# Altium PCB EvoHD_Pro_RevA.PcbDoc
Units mm, origin at the board's own origin, x right, y up, seen from the top; angles counter-clockwise.
Board outline 41 x 131.5 mm, 4 copper layers (Top Layer, Mid Layer 1, Mid Layer 2, Bottom Layer), stack 1.57 mm thick; 11 components, 17 nets, 157 pads, 0 vias.
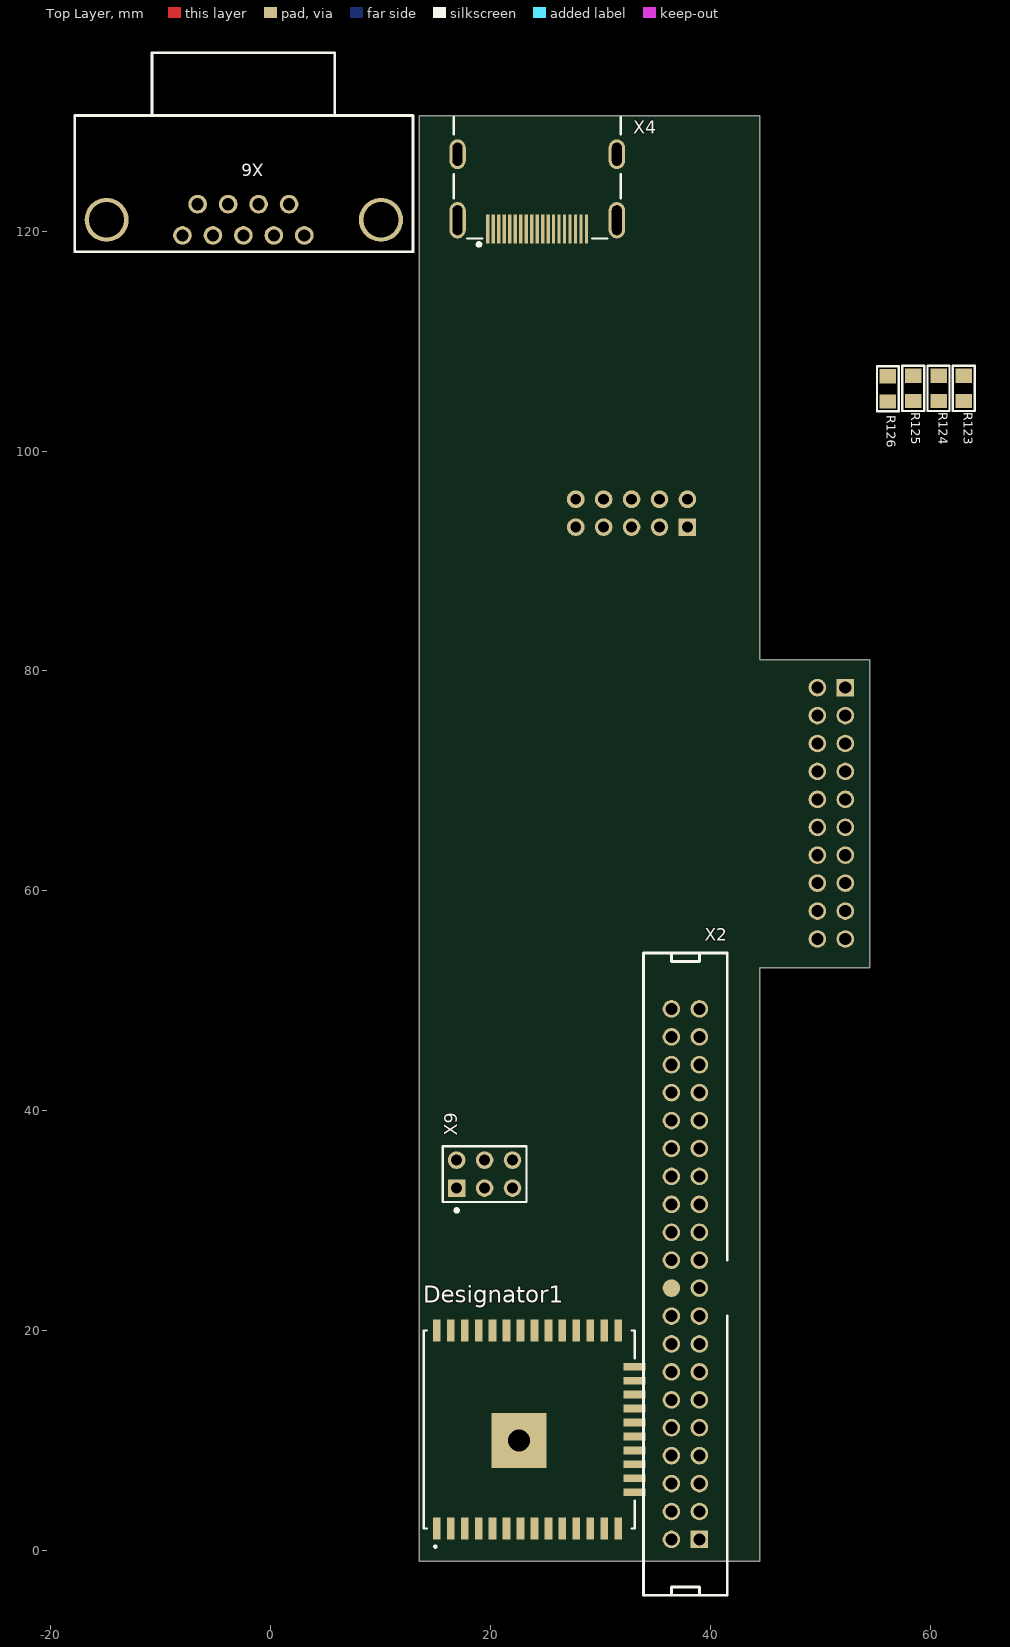
[diagram p0: Top Layer view]
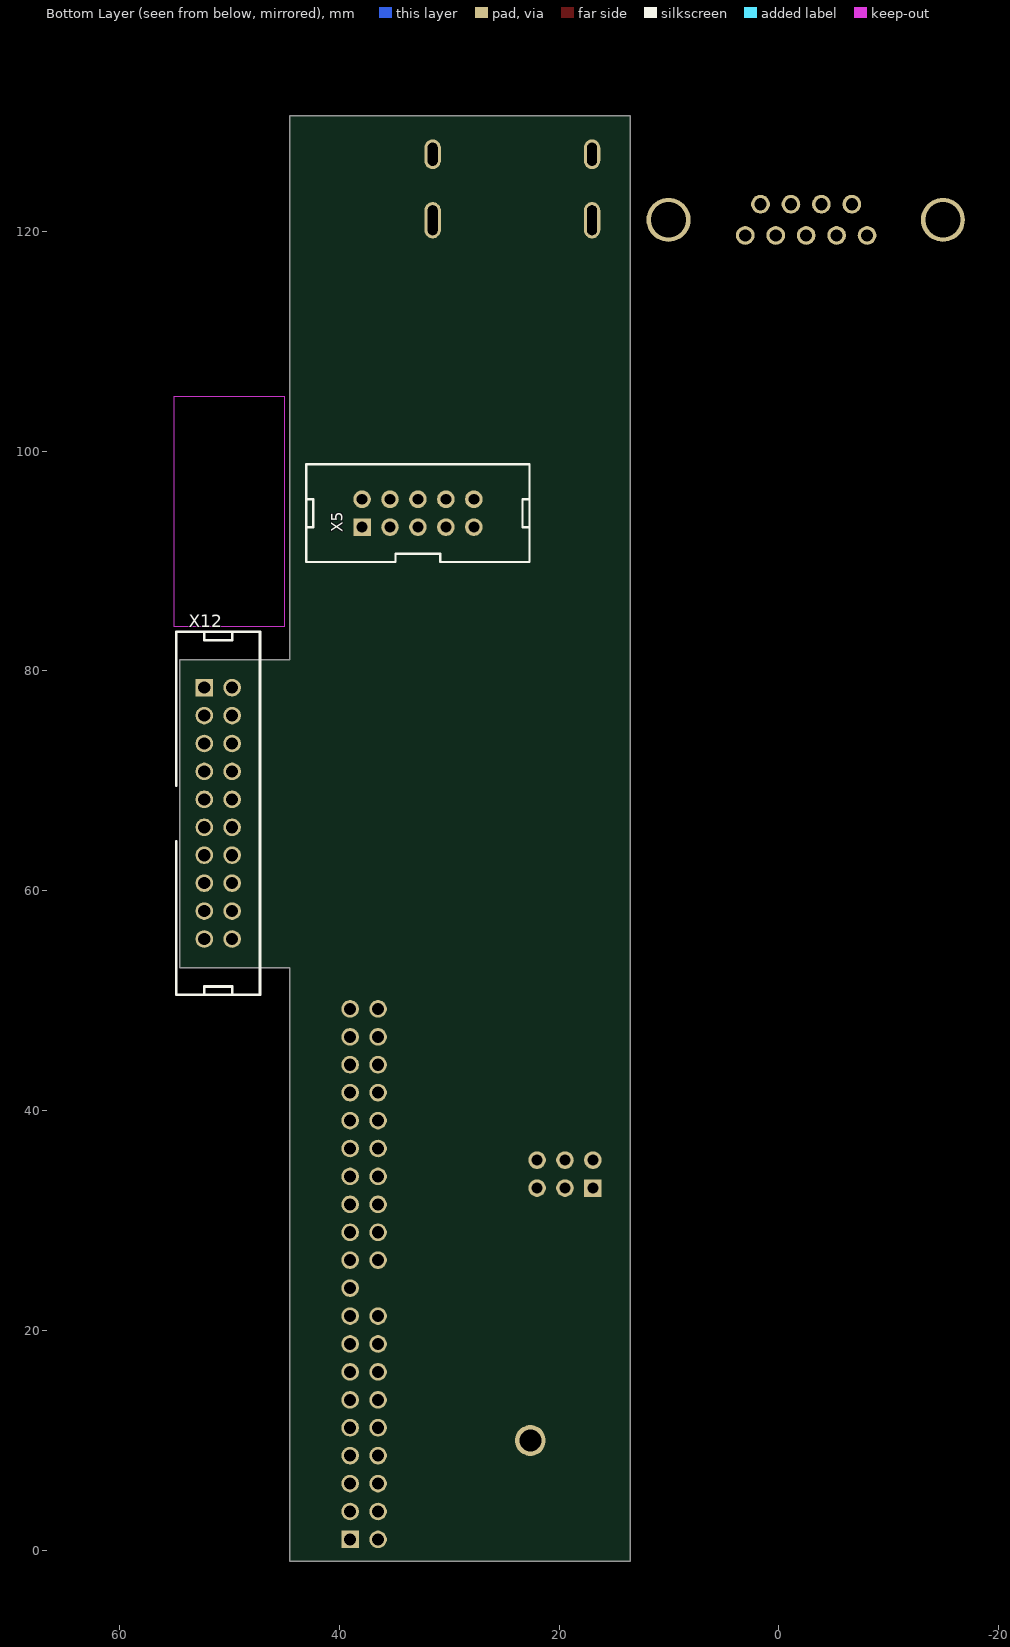
[diagram p1: Bottom Layer view, seen from below]

## Layer stack, top to bottom
Top Solder: solder mask 0.0127, Solder Resist, Dk 3.8
Top Layer: signal copper 0.035
Dielectric 1: prepreg 0.1, 2313, Dk 4.05
Mid Layer 1: signal copper 0.0175
Core: core 1.265, FR-4, Dk 4.5
Mid Layer 2: signal copper 0.0175
Dielectric 2: prepreg 0.1, 2313, Dk 4.05
Bottom Layer: signal copper 0.035
Bottom Solder: solder mask 0.0127, Solder Resist, Dk 3.8

## Board outline
13.5,-1 13.5,130.5 44.5,130.5 44.5,81 54.5,81 54.5,53 44.5,53 44.5,-1

## Design rules (kind name [scope] priority, off if disabled: settings)
BoardOutlineClearance [All] p1: gap=0.2 ignorepadtopadclearanceinfootprint=FALSE
Clearance [All] p1: gap=0.102 ignorepadtopadclearanceinfootprint=FALSE except(0.127: Arc-Via Track-Via SMDPad-Via THPad-Via Via-Via Via-Fill Via-Poly Via-Region Via-Text; 0.25: Arc-Hole Track-Hole SMDPad-Hole THPad-Hole Via-Hole Fill-Hole Poly-Hole Region-Hole Text-Hole)
ComponentClearance [All] p1: gap=0.102 collisioncheckmode=3 verticalgap=0.102 showdistances=TRUE
DiffPairsRouting [All] p1: maxlimit=0.102 minlimit=0.102 mostfreqgap=0.102 toplayer_minwidth=0.102 toplayer_maxwidth=1816.048 toplayer_prefwidth=0.102 midlayer1_minwidth=0.102 midlayer1_maxwidth=1816.048 midlayer1_prefwidth=0.102 midlayer2_minwidth=0.102 midlayer2_maxwidth=1816.048 midlayer2_prefwidth=0.102 bottomlayer_minwidth=0.102 bottomlayer_maxwidth=1816.048 bottomlayer_prefwidth=0.102 maxuncoupledlength=12.7
Height [All] p1: minheight=0 maxheight=1816.048 prefheight=12.7
HoleSize [All] p1: absolutevalues=TRUE maxlimit=6.3 minlimit=0.2 maxpercent=80.000 minpercent=20.000
HoleToHoleClearance [All] p1: gap=0.25 allowstackedmicrovias=FALSE
MinimumAnnularRing [All] p1: minimumring=0.076
MinimumSolderMaskSliver [All] p1: minsoldermaskwidth=0
PasteMaskExpansion [All] p1: expansion=-0.03
PlaneClearance [All] p1: clearance=0.102
PlaneConnect PlaneConnectPowerPads [InPadClass('PowerPads')] p1: planeconnectstyle=Direct reliefexpansion=0.508 reliefentries=4 reliefconductorwidth=0.254 reliefairgap=0.254
PlaneConnect [All] p2: pad.planeconnectstyle=Relief pad.reliefexpansion=0.3 pad.reliefentries=4 pad.reliefconductorwidth=0.102 pad.reliefairgap=0.102 via.planeconnectstyle=Direct via.reliefexpansion=0.3 via.reliefentries=4 via.reliefconductorwidth=0.127 via.reliefairgap=0.127
PolygonConnect PolygonConnectPowerPads [All vs (InPadClass('PowerPads'))] p1: connectstyle=Direct reliefconductorwidth=0.254 reliefentries=4 polygonreliefangle="90 Angle" airgapwidth=0.254
PolygonConnect [All] p2: thpad.connectstyle=Relief thpad.reliefconductorwidth=0.102 thpad.reliefentries=4 thpad.polygonreliefangle="90 Angle" thpad.airgapwidth=0.102 smdpad.connectstyle=Relief smdpad.reliefconductorwidth=0.102 smdpad.reliefentries=4 smdpad.polygonreliefangle="90 Angle" smdpad.airgapwidth=0.102 via.connectstyle=Direct via.reliefconductorwidth=0.127 via.reliefentries=4 via.polygonreliefangle="90 Angle" via.airgapwidth=0.127
RoutingVias [All] p1: holewidth=0.2 width=0.45 viastyle="Through Hole" minholewidth=0.2 minwidth=0.45 maxholewidth=6.3 maxwidth=6.55
SilkToSilkClearance [All] p1: silktosilkclearance=0
SilkToSolderMaskClearance [IsPad] p1: minsilkscreentomaskgap=0.102 clearancetoexposedcopper=TRUE
SolderMaskExpansion [All] p1: expansion=0.075 istentingtop=FALSE
Width [All] p1: maxlimit=1816.048 minlimit=0.102 preferedwidth=0.102
19 further rules are at their usual default settings.

## Classes and differential pairs
differential pair class TDMS_DIFF: LVDS_CK LVDS_D0 LVDS_D1 LVDS_D2
net class TDMS: LVDS_CK_N LVDS_CK_P LVDS_D0_N LVDS_D0_P LVDS_D1_N LVDS_D1_P LVDS_D2_N LVDS_D2_P
differential pair LVDS_D2: +LVDS_D2_P -LVDS_D2_N
differential pair LVDS_D1: +LVDS_D1_P -LVDS_D1_N
differential pair LVDS_D0: +LVDS_D0_P -LVDS_D0_N
differential pair LVDS_CK: +LVDS_CK_P -LVDS_CK_N

## Components (designator, comment, footprint, x,y, rotation, side; value= is the part's Value field where it differs from the comment)
Designator1 "Comment" XCVR_ESP32-WROOM-32U 23.37,11 r90 top
R123 "RESCHIP" R-CHIP 63.055,107.08 r270 top value=10K
R124 "RESCHIP" R-CHIP 60.755,107.08 r270 top value=10K
R125 "RESCHIP" R-CHIP 58.455,107.08 r270 top value=10K
R126 "RESCHIP" R-CHIP 56.145,107.045 r270 top value=10K
X2 "IDE40M" IDE40M 39,1 r270 top
X4 "1827059-3 (685119134923)" "1827059-3 (685119134923)" 24.25,120.2 r180 top locked (schematic designator X2)
X5 "IDC10M" IDC10M 37.915,93.08 r0 bottom
X6 "RS232_9" DSUB-9 3.059,119.618 r180 top
X9 "PLD2 2x3" PLD2-6 16.92,32.96 r180 top (schematic designator X6)
X12 "IDC20" IDC20 52.272,78.48 r180 bottom

## Footprints (in the part's own frame and the unit in brackets; to place one, negate y for a bottom-side part, rotate by r counter-clockwise, add the part's x,y. Pads: shape width x height; smd on the part's side, far side on the other; paste and mask are expansions set on the pad)
"1827059-3 (685119134923)" [mm]
  rect 0.28x2.6 smd: 1(4.5,0) 2(4,0) 3(3.5,0) 4(3,0) 5(2.5,0) 6(2,0) 7(1.5,0) 8(1,0) 9(0.5,0) 10(0,0) 11(-0.5,0) 12(-1,0) 13(-1.5,0) 14(-2,0) 15(-2.5,0) 16(-3,0) 17(-3.5,0) 18(-4,0) 19(-4.5,0)
  oval 1.5x3.3 hole 0.9 slot 2.7 at 90 deg: S1(-7.25,-0.8) S2(7.25,-0.8)
  oval 1.5x2.7 hole 0.9 slot 2.1 at 90 deg: S3(-7.25,-6.8) S4(7.25,-6.8)
  silkscreen extent -7.6,-10.2 7.6,1.5, body extent -7.5,-11.35 7.5,0.8, height 6.18
DSUB-9 [mm]
  round 1.7 hole 1.1: 1(0,0) 2(2.77,0) 3(5.54,0) 4(8.31,0) 5(11.08,0) 6(1.385,-2.84) 7(4.155,-2.84) 8(6.925,-2.84) 9(9.695,-2.84)
  round 4 hole 3.2: 10(-6.98,-1.42) 11(17.98,-1.42)
  silkscreen extent -9.88,-16.62 20.88,1.48
IDC10M [mm]
  rect 1.6x1.6 hole 1: 1(0,0)
  round 1.6 hole 1: 2(0,-2.54) 3(-2.54,0) 4(-2.54,-2.54) 5(-5.08,0) 6(-5.08,-2.54) 7(-7.62,0) 8(-7.62,-2.54) 9(-10.16,0) 10(-10.16,-2.54)
  silkscreen extent -15.24,-5.71 5.08,3.17, body extent -15.21,-6.1 5.11,3.12, height 9
IDC20 [mm]
  rect 1.6x1.6 hole 1.1: 1(0,0)
  round 1.6 hole 1.1: 2(2.54,0) 3(0,-2.54) 4(2.54,-2.54) 5(0,-5.08) 6(2.54,-5.08) 7(0,-7.62) 8(2.54,-7.62) 9(0,-10.16) 10(2.54,-10.16) 11(0,-12.7) 12(2.54,-12.7) 13(0,-15.24) 14(2.54,-15.24) 15(0,-17.78) 16(2.54,-17.78) 17(0,-20.32) 18(2.54,-20.32) 19(0,-22.86) 20(2.54,-22.86)
  silkscreen extent -2.54,-27.94 5.08,5.08, body extent -3.25,-27.97 5.65,5.23, height 9.1
IDE40M [mm]
  rect 1.6x1.6 hole 1.1 unplated: 1(0,0)
  round 1.6 hole 1.1: 2(0,-2.54) 3(-2.54,0) 4(-2.54,-2.54) 5(-5.08,0) 6(-5.08,-2.54) 7(-7.62,0) 8(-7.62,-2.54) 9(-10.16,0) 10(-10.16,-2.54) 11(-12.7,0) 12(-12.7,-2.54) 13(-15.24,0) 14(-15.24,-2.54) 15(-17.78,0) 16(-17.78,-2.54) 17(-20.32,0) 18(-20.32,-2.54) 19(-22.86,0) 21(-25.4,0) 22(-25.4,-2.54) 23(-27.94,0) 24(-27.94,-2.54) 25(-30.48,0) 26(-30.48,-2.54) 27(-33.02,0) 28(-33.02,-2.54) 29(-35.56,0) 30(-35.56,-2.54) 31(-38.1,0) 32(-38.1,-2.54) 33(-40.64,0) 34(-40.64,-2.54) 35(-43.18,0) 36(-43.18,-2.54) 37(-45.72,0) 38(-45.72,-2.54) 39(-48.26,0) 40(-48.26,-2.54)
  round 1.6 smd: 20(-22.86,-2.54)
  silkscreen extent -53.34,-5.08 5.08,2.54
PLD2-6 [mm]
  rect 1.6x1.6 hole 1: 1(0,0)
  round 1.6 hole 1: 2(0,-2.54) 3(-2.54,0) 4(-2.54,-2.54) 5(-5.08,0) 6(-5.08,-2.54)
  silkscreen extent -6.35,-3.81 1.27,2.18
R-CHIP [mm]
  rect 1.3x1.5 smd: 1(0.225,0) 2(2.525,0)
  silkscreen extent -0.67,-1 3.42,1, body extent 0.4,-0.62 2.4,0.63, height 0.7
XCVR_ESP32-WROOM-32U [mm]
  rect 2x0.7 smd: 1(-9,8.26) 2(-9,6.99) 3(-9,5.72) 4(-9,4.45) 5(-9,3.18) 6(-9,1.91) 7(-9,0.64) 8(-9,-0.63) 9(-9,-1.9) 10(-9,-3.17) 11(-9,-4.44) 12(-9,-5.71) 13(-9,-6.98) 14(-9,-8.25) 25(9,-8.25) 26(9,-6.98) 27(9,-5.71) 28(9,-4.44) 29(9,-3.17) 30(9,-1.9) 31(9,-0.63) 32(9,0.64) 33(9,1.91) 34(9,3.18) 35(9,4.45) 36(9,5.72) 37(9,6.99) 38(9,8.26)
  rect 0.7x2 smd: 15(-5.715,-9.75) 16(-4.445,-9.75) 17(-3.175,-9.75) 18(-1.905,-9.75) 19(-0.635,-9.75) 20(0.635,-9.75) 21(1.905,-9.75) 22(3.175,-9.75) 23(4.445,-9.75) 24(5.715,-9.75)
  rect 5x5 / inner rect 5x5 / far side round 2.8 hole 2: G.1(-1,0.76)
  silkscreen extent -10.75,-9.75 9,9.45, body extent -9,-9.75 9,9.45, height 3.3

## Part data
X4: "HDMI Connector", Package=None, Availability=Unavailable, MF="Stewart Connector", MP=SS-53000-001, Price=None, SnapEDA_Link=https://www.snapeda.com/parts/SS-53000-001/Stewart%20Connector/view-part/4628816/?ref=snap
X9: library part PLD2-6

## Nets (pads, with @x,y where several pads share a name; then routed paths per layer and width w, separated by ;. In a path a pad name is that pad's centre, name@x,y a point inside that pad or via, vN(x,y) a via of type N, cw(c..) or ccw(c..) an arc to the next point about the centre after c; other vN are vias at no path point)
1V8: 
3V3: 
5V0: 
FPGA_GNDA: 
FPGA_VCCA: 
FPGA_VCCINT: 
FPGA_VCCPLL: 
GND: 
HP: 
LVDS_CK_N: 
LVDS_CK_P: 
LVDS_D0_N: 
LVDS_D0_P: 
LVDS_D1_N: 
LVDS_D1_P: 
LVDS_D2_N: 
LVDS_D2_P: 
pads on no net: Designator1.1 Designator1.2 Designator1.3 Designator1.4 Designator1.5 Designator1.6 Designator1.7 Designator1.8 Designator1.9 Designator1.10 Designator1.11 Designator1.12 Designator1.13 Designator1.14 Designator1.15 Designator1.16 Designator1.17 Designator1.18 Designator1.19 Designator1.20 Designator1.21 Designator1.22 Designator1.23 Designator1.24 Designator1.25 Designator1.26 Designator1.27 Designator1.28 Designator1.29 Designator1.30 Designator1.31 Designator1.32 Designator1.33 Designator1.34 Designator1.35 Designator1.36 Designator1.37 Designator1.38 Designator1.G.1 R123.1 R123.2 R124.1 R124.2 R125.1 R125.2 R126.1 R126.2 X2.1 X2.2 X2.3 X2.4 X2.5 X2.6 X2.7 X2.8 X2.9 X2.10 X2.11 X2.12 X2.13 X2.14 X2.15 X2.16 X2.17 X2.18 X2.19 X2.20 X2.21 X2.22 X2.23 X2.24 X2.25 X2.26 X2.27 X2.28 X2.29 X2.30 X2.31 X2.32 X2.33 X2.34 X2.35 X2.36 X2.37 X2.38 X2.39 X2.40 X4.1 X4.2 X4.3 X4.4 X4.5 X4.6 X4.7 X4.8 X4.9 X4.10 X4.11 X4.12 X4.13 X4.14 X4.15 X4.16 X4.17 X4.18 X4.19 X4.S1 X4.S2 X4.S3 X4.S4 X5.1 X5.2 X5.3 X5.4 X5.5 X5.6 X5.7 X5.8 X5.9 X5.10 X6.1 X6.2 X6.3 X6.4 X6.5 X6.6 X6.7 X6.8 X6.9 X6.10 X6.11 X9.1 X9.2 X9.3 X9.4 X9.5 X9.6 X12.1 X12.2 X12.3 X12.4 X12.5 X12.6 X12.7 X12.8 X12.9 X12.10 X12.11 X12.12 X12.13 X12.14 X12.15 X12.16 X12.17 X12.18 X12.19 X12.20

## Keep-outs
Bottom Layer:
  rectangle: 45,84 55,105

## Silkscreen, mask and mechanical layers (free items; w line width, h text height)
Mechanical 1:
  the board outline again, w0.2

## Dimensions
54.5,81 to 13.5,130.5 on Top Layer

## Text inside footprints (layer, text, board x,y; h text height)
X4: Mechanical 13 "PCB Edge" at 26.55,131.35 h0.61 r180; Mechanical 13 "1" at 19.2,121.3 h0.61 r180; Mechanical 13 "19" at 30.1,121.4 h0.61 r180